# Altium PCB universky.PcbDoc
Units mil, origin at the board's own origin, x right, y up, seen from the top; angles counter-clockwise.
Board outline 2265.45 x 1390.45 mil, 4 copper layers (Top Layer, GND, 3.3V, Bottom Layer); 89 components, 109 nets, 441 pads, 43 vias.
Unrouted connection lines stored in the file: 22.
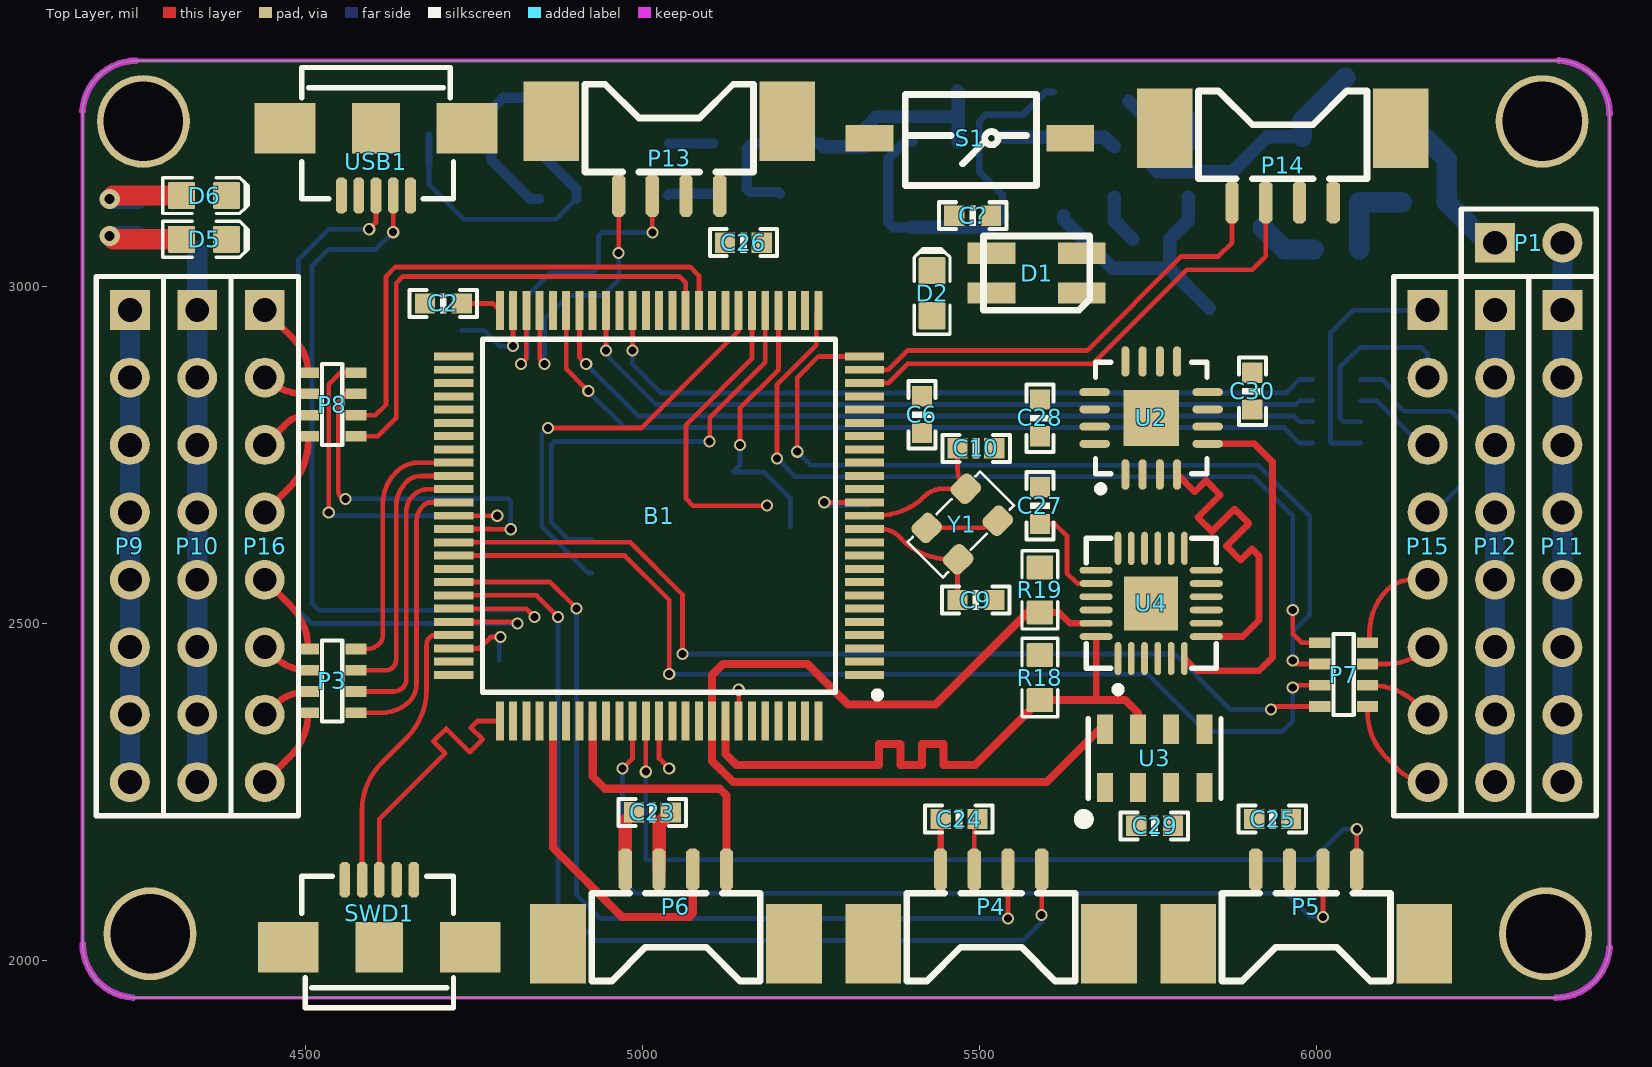
[diagram p0: Top Layer view]
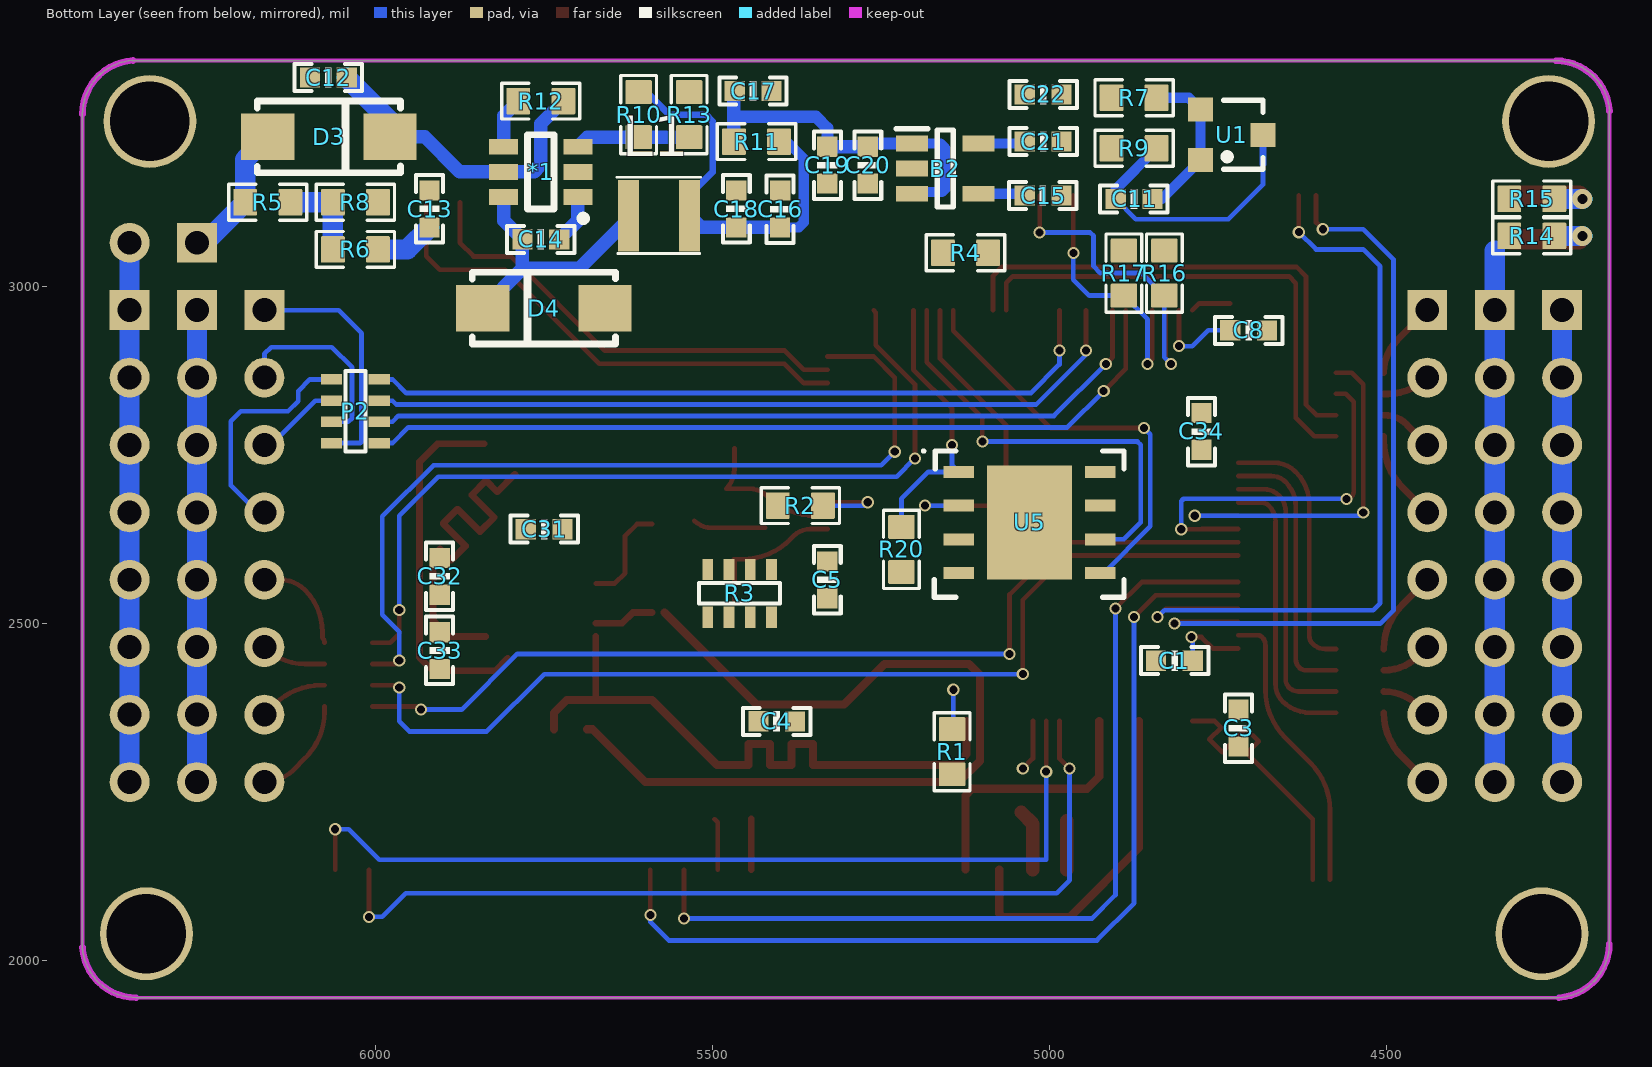
[diagram p1: Bottom Layer view, seen from below]
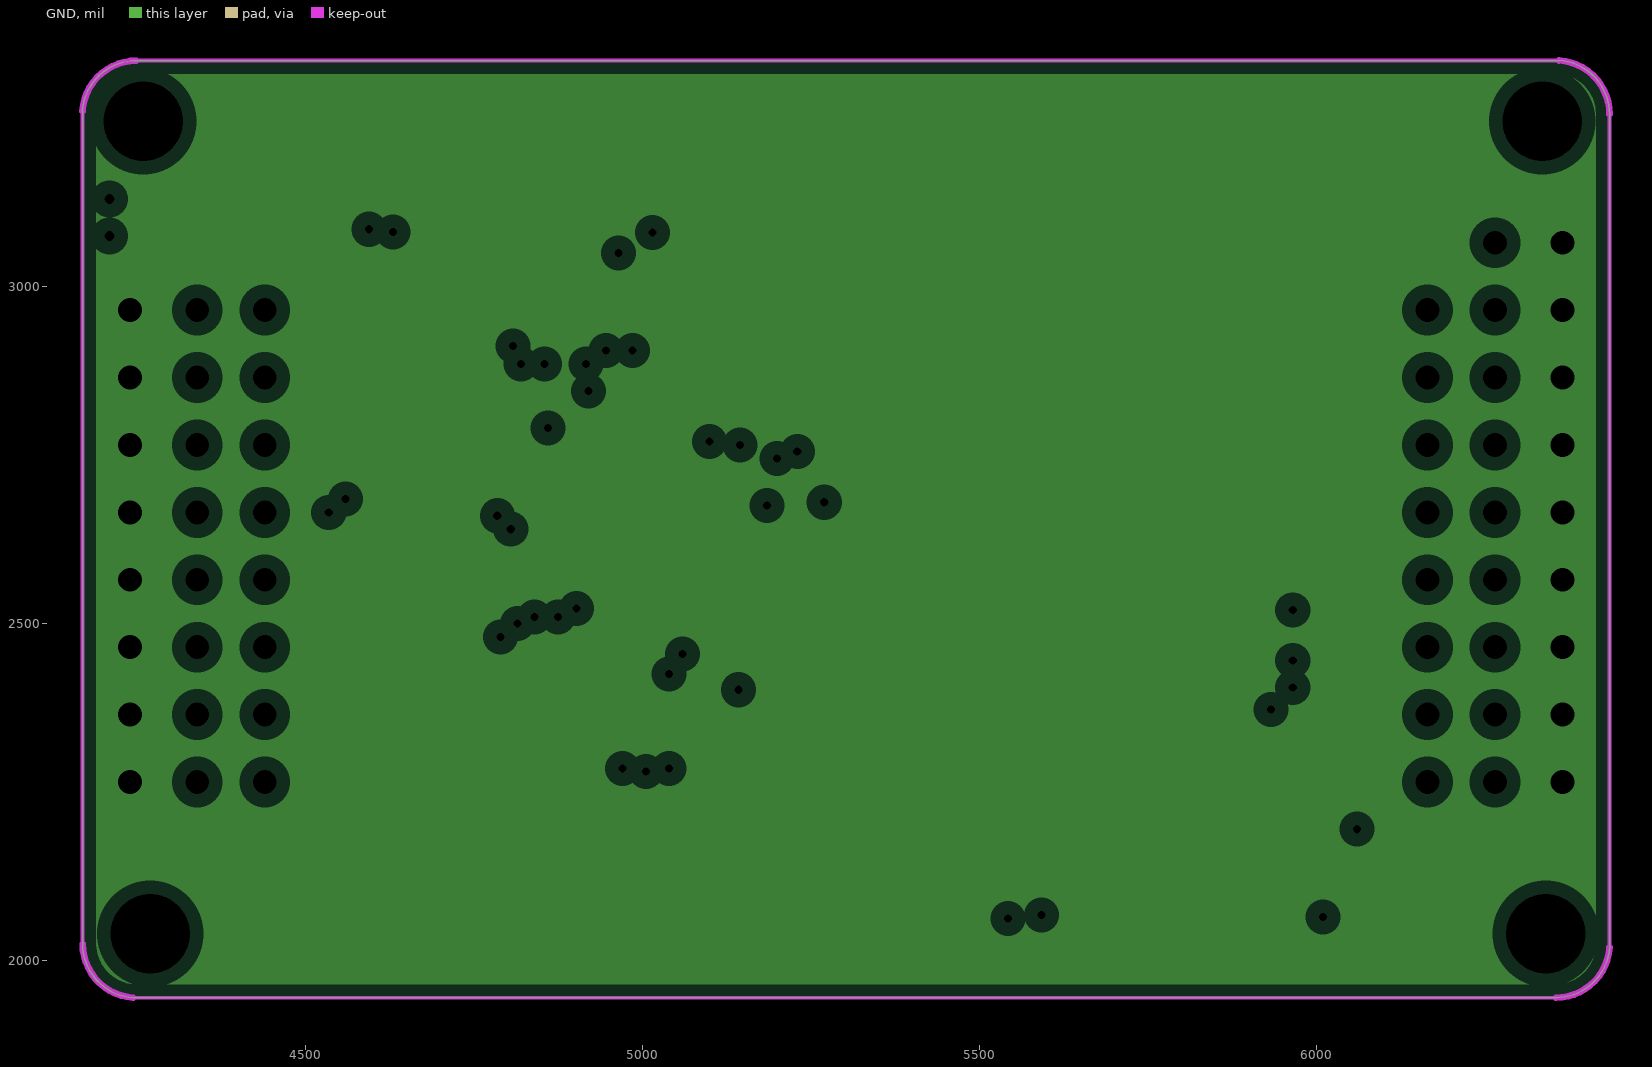
[diagram p2: GND, clearances drawn from the general rule]
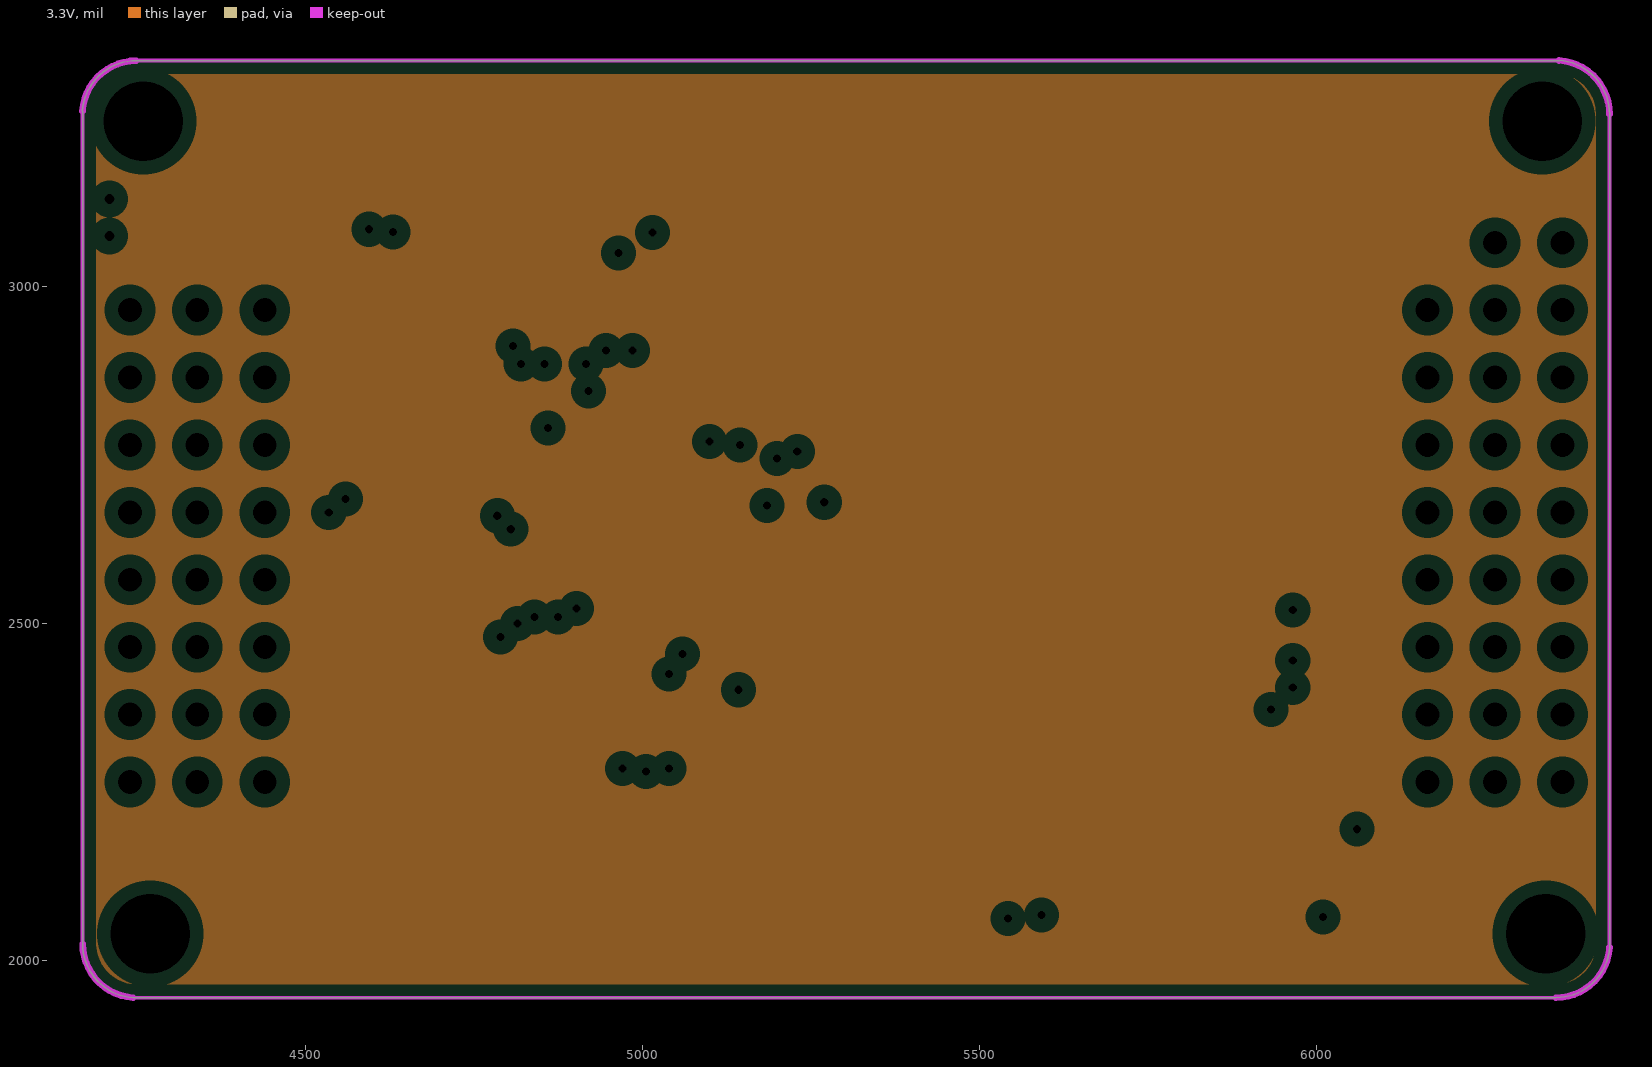
[diagram p3: 3.3V, clearances drawn from the general rule]
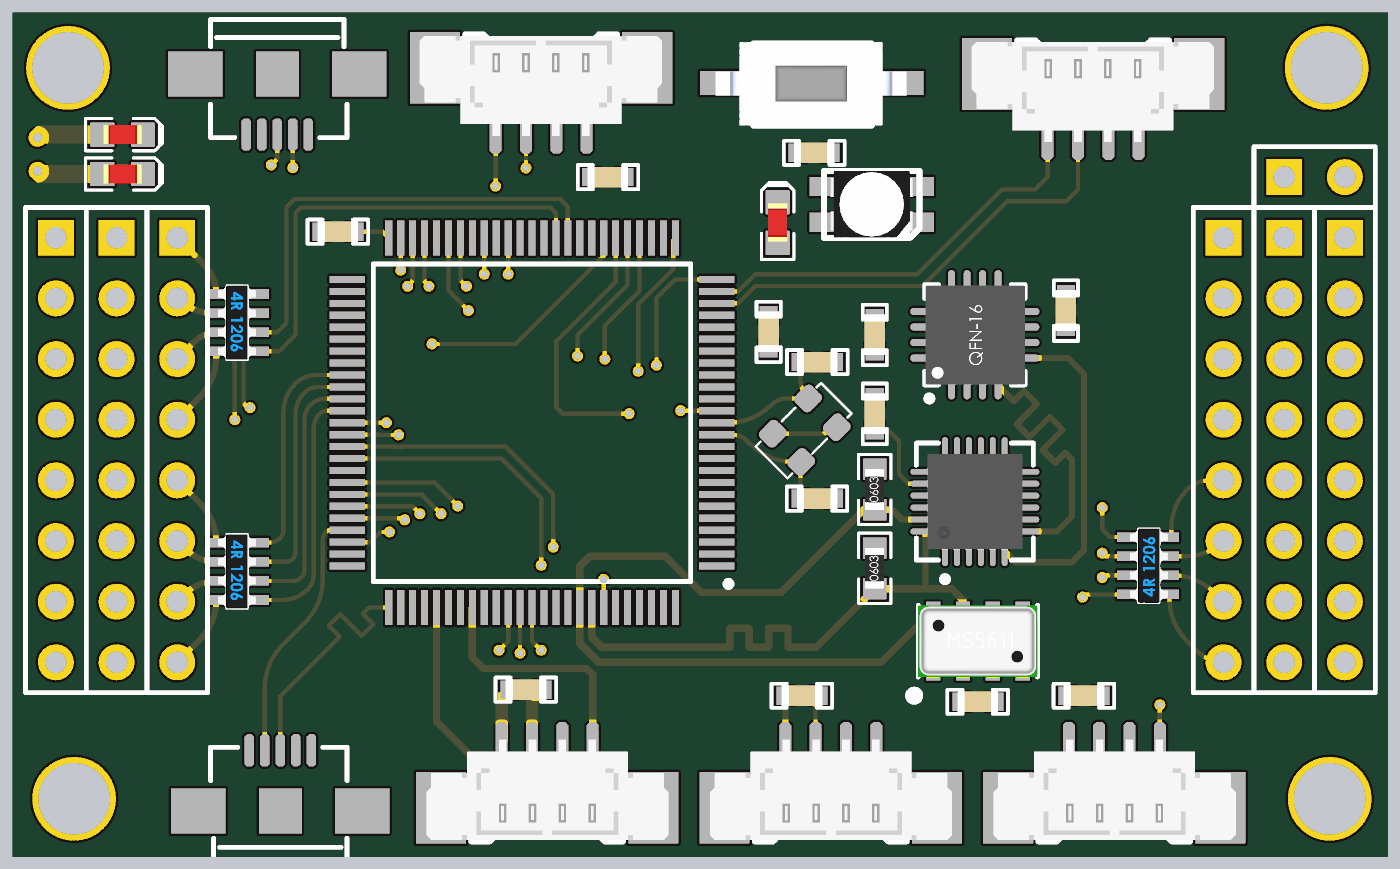
[diagram p4: 3D render of the assembled board from above, using the file's embedded part models]
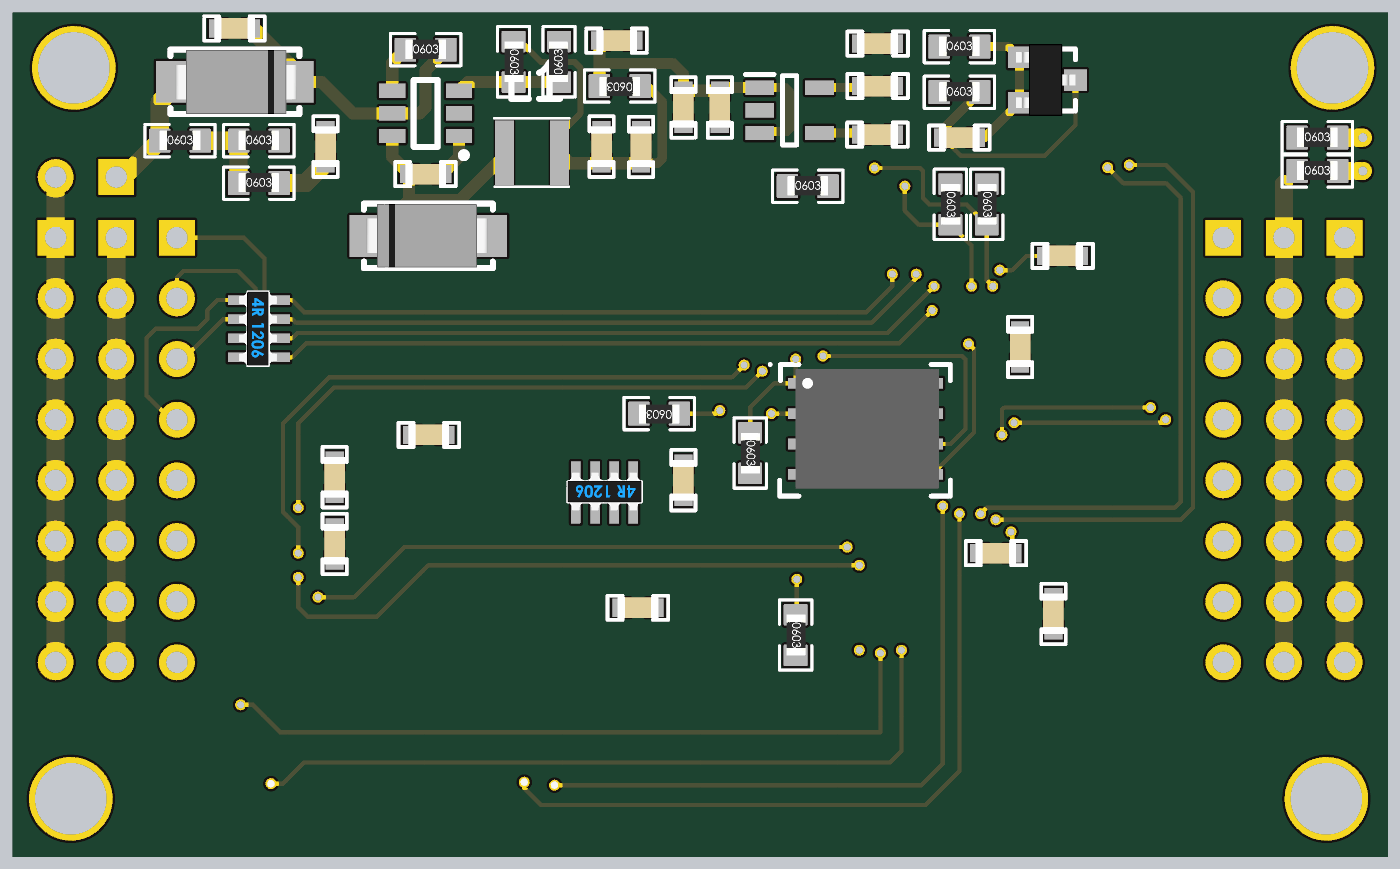
[diagram p5: 3D render of the assembled board from below, using the file's embedded part models]

## Layer stack, top to bottom
Top Layer: signal copper 1.4
Dielectric: core 12.6, FR-4, Dk 4.8
GND: plane copper 1.4, net GND
Dielectric: prepreg 12.6, FR-4, Dk 4.8
3.3V: plane copper 1.4, net 3.3V
Dielectric: core 12.6, FR-4, Dk 4.8
Bottom Layer: signal copper 1.4

## Board outline
4170,2025 ccw(c4250,2025) 4244.89,1945.16 4244.89,1945 6355.16,1945 6355.16,1945.11 ccw(c6355.16,2025.11) 6435,2020 6435,3255.62 6434.92,3255.62 ccw(c6354.92,3255.62) 6360.03,3335.45 6360.03,3335 4249.38,3335 4249.38,3334.92 ccw(c4249.38,3254.92) 4169.55,3260.03 4170,3260.03

## Design rules (kind name [scope] priority, off if disabled: settings)
Clearance [All] p1: gap=7
ComponentClearance [All] p1: gap=0 collisioncheckmode=3 verticalgap=0 showdistances=FALSE
Length "InNet('SWCLK') Or InNet('SWDIO')_1" [InNet('SWCLK') Or InNet('SWDIO')] p1: maxlimit=436 minlimit=420
Length "InNet('AUX_CL') Or InNet('AUX_DA')_1" [InNet('AUX_CL') Or InNet('AUX_DA')] p2: maxlimit=556 minlimit=520
Length "InNet('AUX_CL') Or InNet('AUX_DA')" [InNet('AUX_CL') Or InNet('AUX_DA')] p3: maxlimit=560 minlimit=520
Length "InNet('AUX_DA') Or InNet('AUX_CL')" [InNet('AUX_DA') Or InNet('AUX_CL')] p4: maxlimit=290 minlimit=360
Length "InNet('I2C1_SDA') Or InNet('I2C1_SCL')" [InNet('I2C1_SDA') Or InNet('I2C1_SCL')] p5: maxlimit=712 minlimit=650
Length "InNet('SWCLK') Or InNet('SWDIO')" [InNet('SWCLK') Or InNet('SWDIO')] p6: maxlimit=420 minlimit=380
PlaneClearance [All] p1: clearance=20
PlaneConnect [All] p1: planeconnectstyle=Relief reliefexpansion=20 reliefentries=4 reliefconductorwidth=10 reliefairgap=10
PolygonConnect [All] p1: connectstyle=Relief reliefconductorwidth=10 reliefentries=4 polygonreliefangle="90 Angle" airgapwidth=10
RoutingVias [All] p1: holewidth=28 width=50 viastyle="Through Hole" minholewidth=28 minwidth=50 maxholewidth=28 maxwidth=50
SilkToSilkClearance [All] p1: silktosilkclearance=0
SilkToSolderMaskClearance [IsPad] p1: minsilkscreentomaskgap=0 clearancetoexposedcopper=TRUE
SolderMaskExpansion [All] p1: expansion=4
Width [All] p1: maxlimit=100 minlimit=6 preferedwidth=10 minimp=50.000000 maximp=50.000000 favimp=50.000000
23 further rules are at their usual default settings.

## Classes and differential pairs
component class universky-CONNECTOR: C23 C24 C25 C26 P2 P4 P5 P6 P7 P8 P9 P10 P11 P12 P13 P14 P15 P16 R16 R17
component class universky-MCU: B1 C1 C2 C3 C4 C5 C6 C8 C9 C10 C? D1 D2 R1 R2 R3 R4 S1 SWD1 USB1 Y1
component class universky-POWER: *1 B2 C11 C12 C13 C14 C15 C16 C17 C18 C19 C20 C21 C22 D3 D4 D5 D6 L1 P1 R5 R6 R7 R8 R9 R10 R11 R12 R13 R14 R15 U1
component class universky-SENSOR: C27 C28 C29 C30 C31 C32 C33 C34 R18 R19 R20 U2 U3 U4 U5

## Components (designator, comment, footprint, x,y, rotation, side; value= is the part's Value field where it differs from the comment)
*1 "AOZ1282C" LMR14206 5755,3170 r180 bottom
B1 "STM32F407VGT6" QFP50P1600X1600X160-100N 5025,2660 r180 top
B2 "MIC5219-3.3YM5_TR" SOT95P280X145-5N 5155,3175 r180 bottom
C1 "Cap" 0603_C 4815,2445 r0 bottom
C2 "Cap" 0603_C 4705,2975 r0 top
C3 "Cap" 0603_C 4720,2345 r90 bottom
C4 "Cap" 0603_C 5405,2355 r180 bottom
C5 "Cap" 0603_C 5330,2565 r270 bottom
C6 "Cap" 0603_C 5415,2810 r90 top
C8 "Cap" 0603_C 4705,2935 r0 bottom
C9 "22pF" 0603_C 5495,2535 r0 top
C10 "22pF" 0603_C 5495,2760 r180 top
C11 "Cap" 0603_C 4875,3130 r180 bottom
C12 "47uf" 0603_C 6070,3310 r180 bottom
C13 "47uf" 0603_C 5920,3115 r270 bottom
C14 "Cap" 0603_C 5755,3070 r180 bottom
C15 "Cap" 0603_C 5010,3135 r180 bottom
C16 "104" 0603_C 5400,3115 r90 bottom
C17 "104" 0603_C 5440,3290 r180 bottom
C18 "47uf" 0603_C 5465,3115 r270 bottom
C19 "Cap" 0603_C 5330,3180 r90 bottom
C20 "Cap" 0603_C 5270,3180 r90 bottom
C21 "Cap" 0603_C 5010,3215 r0 bottom
C22 "Cap" 0603_C 5010,3285 r0 bottom
C23 "Cap" 0603_C 5015,2220 r0 top
C24 "Cap" 0603_C 5470,2210 r0 top
C25 "Cap" 0603_C 5935,2210 r0 top
C26 "Cap" 0603_C 5150,3065 r180 top
C27 "Cap" 0603_C 5590,2675 r90 top
C28 "Cap" 0603_C 5590,2805 r90 top
C29 "Cap" 0603_C 5760,2200 r0 top
C30 "Cap" 0603_C 5905,2845 r90 top
C31 "Cap" 0603_C 5750,2640 r0 bottom
C32 "Cap" 0603_C 5905,2570 r270 bottom
C33 "Cap" 0603_C 5905,2460 r270 bottom
C34 "Cap" 0603_C 4775,2785 r90 bottom
C? "Cap" 0603_C 5490,3105 r180 top
D1 "RGB-2" RGB-2 5585,3010 r0 top
D2 "LED0" 0603_LED 5430,2990 r90 top
D3 "1N5819" DO_214 6080,3220 r180 bottom
D4 "1N5819" DO_214 5740,2970 r0 bottom
D5 "LED0" 0603_LED 4350,3070 r0 top
D6 "LED0" 0603_LED 4350,3135 r0 top
L1 "15uh" L3*3 5625,3105 r180 bottom
P1 "Header 2" HDR1X2 6265,3065 r0 top
P2 "1K排阻" HDR_R_4 6155,2825 r0 bottom
P3 "10K排阻" HDR_R_4 4415,2425 r180 top
P4 "USART1" SMD-1.25 5522.5,2075 r180 top
P5 "USART2" SMD-1.25 5990,2075 r180 top
P6 "USART5" SMD-1.25 5055,2075 r180 top
P7 "1K排阻" HDR_R_4 6165.43,2414.25 r0 top
P8 "10K排阻" HDR_R_4 4415,2835 r180 top
P9 "Header 8" HDR1X8 4240,2965 r270 top
P10 "Header 8" HDR1X8 4340,2965 r270 top
P11 "Header 8" HDR1X8 6365,2965 r270 top
P12 "Header 8" HDR1X8 6265,2965 r270 top
P13 "I2C" SMD-1.25 5035,3195 r0 top
P14 "I2C" SMD-1.25 5945,3185 r0 top
P15 "Header 8" HDR1X8 6165,2965 r270 top
P16 "Header 8" HDR1X8 4440,2965 r270 top
R1 "Res2" 0603_R 5145,2310 r270 bottom
R2 "RES_10K" 0603_R 5370,2675 r0 bottom
R3 "100排阻" HDR_R_4 5450,2670 r90 bottom
R4 "Res2" 0603_R 5125,3050 r180 bottom
R5 "Res2" 0603_R 6160,3125 r180 bottom
R6 "Res2" 0603_R 6030,3055 r180 bottom
R7 "Res2" 0603_R 4875,3280 r180 bottom
R8 "Res2" 0603_R 6030,3125 r180 bottom
R9 "Res2" 0603_R 4875,3205 r180 bottom
R10 "Res2" 0603_R 5610,3255 r270 bottom
R11 "Res2" 0603_R 5435,3215 r0 bottom
R12 "Res2" 0603_R 5755,3275 r180 bottom
R13 "Res2" 0603_R 5535,3255 r90 bottom
R14 "Res2" 0603_R 4285,3075 r180 bottom
R15 "Res2" 0603_R 4285,3130 r180 bottom
R16 "Res2" 0603_R 4830,3020 r270 bottom
R17 "Res2" 0603_R 4890,3020 r270 bottom
R18 "Res2" 0603_R 5590,2420 r90 top
R19 "Res2" 0603_R 5590,2550 r90 top
R20 "Res2" 0603_R 5220,2610 r270 bottom
S1 "SW-PB" KEY_SMD 5483.3,3217.8 r180 top
SWD1 "Header 5" USB_Micro 4610,2020 r0 top
U1 "TL431A" SOT_23 4730,3225 r270 bottom
U2 "AK8975" QFN_16 5770,2800 r90 top
U3 "MS5611" QFN_8 5740,2300 r90 top
U4 "MPU6050" QFN_24 5764.69,2535 r0 top
U5 "W25Q32FVZPIG" WDFN_8 5030,2660 r180 bottom
USB1 "Header 5" USB_Micro 4605,3235 r180 top
Y1 "XATLS" XTAL_3225 5528.08,2651.92 r225 top

## Footprints (in the part's own frame and the unit in brackets; to place one, negate y for a bottom-side part, rotate by r counter-clockwise, add the part's x,y. Pads: shape width x height; smd on the part's side, far side on the other; paste and mask are expansions set on the pad)
0603_C [mil]
  rect 30x30 smd: 1(-27.25,0.03) 2(27.25,-0.03)
  silkscreen extent -50,-20 50,20, body extent -33,-18 33,18, height 35
0603_LED [mil]
  rrect10% 40.5x40 smd: 1(-33.46,0)
  rrect10% 40x40 smd: 2(33.46,0)
  silkscreen extent -61,-27 66,27, body extent -31,-16 32,16, height 30
0603_R [mm]
  rrect10% 0.9x1 smd: 1(-0.85,0) 2(0.85,0)
  silkscreen extent -1.47,-0.67 1.47,0.67, body extent -0.85,-0.38 0.85,0.42, height 0.56
DO_214 [mm]
  rect 2x1.75 smd: 1(-2.032,0.051) 2(2.568,0.051)
  silkscreen extent -2.43,-1.3 2.97,1.4, body extent -2.23,-1.29 2.88,1.38, height 2.12
HDR1X2 [mm] "Connector; Header; 2 Position"
  rect 1.5x1.5 hole 0.9: 1(0,0)
  round 1.5 hole 0.9: 2(2.54,0)
  silkscreen extent -1.27,-1.27 3.81,1.27
HDR1X8 [mm] "Connector; Header; 8 Position"
  rect 1.5x1.5 hole 0.9: 1(0,0)
  round 1.5 hole 0.9: 2(2.54,0) 3(5.08,0) 4(7.62,0) 5(10.16,0) 6(12.7,0) 7(15.24,0) 8(17.78,0)
  silkscreen extent -1.27,-1.27 19.05,1.27
HDR_R_4 [mm]
  rect 0.8x0.4 smd: 1(-4.075,1.454) 2(-4.075,0.654) 3(-4.075,-0.146) 4(-4.075,-0.946) 5(-2.275,1.454) 6(-2.275,0.654) 7(-2.275,-0.146) 8(-2.275,-0.946)
  silkscreen extent -3.56,-1.27 -2.79,1.78, body extent -3.94,-1.35 -2.34,1.85, height 0.59
KEY_SMD [mm]
  rect 1.8x1 smd: 1(-3.853,-0.056) 2(3.716,-0.056)
  silkscreen extent -2.58,-1.71 2.37,1.72, body extent -4.04,-1.78 3.96,1.72, height 8.02
L3*3 [mm]
  rect 0.8x2.7 smd mask+0.051: 1(0,0) 2(2.3,0)
  silkscreen extent -0.43,-1.42 2.72,1.45
LMR14206 [mm]
  rect 1.1x0.6 smd: 1(1.4,-0.95) 2(1.4,0) 3(1.4,0.95) 4(-1.4,0.95) 5(-1.4,0) 6(-1.4,-0.95)
  silkscreen extent -0.5,-1.87 1.72,1.4
QFN_8 [mm]
  rect 1.1x0.6 smd: 1(-1.1,1.367) 2(-1.1,0.117) 3(-1.1,-1.133) 4(-1.1,-2.383) 5(1.1,-2.383) 6(1.1,-1.133) 7(1.1,0.117) 8(1.1,1.367)
  silkscreen extent -2.41,-3.01 1.5,2.29, body extent -1.55,-3.01 1.55,1.99, height 1.01
QFN_16 [mm]
  oval 1.15x0.3 smd: 1(-2.002,1.356) 2(-2.002,0.706) 3(-2.002,0.056) 4(-2.002,-0.594) 9(2.256,-0.594) 10(2.256,0.056) 11(2.256,0.706) 12(2.256,1.356)
  oval 0.3x1.15 smd: 5(-0.848,-1.748) 6(-0.198,-1.748) 7(0.452,-1.748) 8(1.102,-1.748) 13(1.102,2.51) 14(0.452,2.51) 15(-0.198,2.51) 16(-0.848,2.51)
  rect 2.1x2.1 smd: 17(0.127,0.381)
  silkscreen extent -2.66,-1.72 2.23,2.48, body extent -1.97,-1.72 2.2,2.45, height 0.85
QFN_24 [mm]
  oval 0.25x1.25 smd: 1(-1.496,-2.202) 2(-0.996,-2.202) 3(-0.496,-2.202) 4(0.004,-2.202) 5(0.504,-2.202) 6(1.004,-2.202) 13(1.004,1.948) 14(0.504,1.948) 15(0.004,1.948) 16(-0.496,1.948) 17(-0.996,1.948) 18(-1.496,1.948)
  oval 1.25x0.25 smd: 7(1.829,-1.377) 8(1.829,-0.877) 9(1.829,-0.377) 10(1.829,0.123) 11(1.829,0.623) 12(1.829,1.123) 19(-2.321,1.123) 20(-2.321,0.623) 21(-2.321,0.123) 22(-2.321,-0.377) 23(-2.321,-0.877) 24(-2.321,-1.377)
  rect 2.032x2.032 smd: 25(-0.246,-0.127)
  silkscreen extent -2.7,-3.5 2.2,2.32, body extent -2.25,-2.13 1.75,1.87, height 1
QFP50P1600X1600X160-100N [mm]
  rect 1.475x0.3 smd: 1(-7.738,6) 2(-7.738,5.5) 3(-7.738,5) 4(-7.738,4.5) 5(-7.738,4) 6(-7.738,3.5) 7(-7.738,3) 8(-7.738,2.5) 9(-7.738,2) 10(-7.738,1.5) 11(-7.738,1) 12(-7.738,0.5) 13(-7.738,0) 14(-7.738,-0.5) 15(-7.738,-1) 16(-7.738,-1.5) 17(-7.738,-2) 18(-7.738,-2.5) 19(-7.738,-3) 20(-7.738,-3.5) 21(-7.738,-4) 22(-7.738,-4.5) 23(-7.738,-5) 24(-7.738,-5.5) 25(-7.738,-6) 51(7.738,-6) 52(7.738,-5.5) 53(7.738,-5) 54(7.738,-4.5) 55(7.738,-4) 56(7.738,-3.5) 57(7.738,-3) 58(7.738,-2.5) 59(7.738,-2) 60(7.738,-1.5) 61(7.738,-1) 62(7.738,-0.5) 63(7.738,0) 64(7.738,0.5) 65(7.738,1) 66(7.738,1.5) 67(7.738,2) 68(7.738,2.5) 69(7.738,3) 70(7.738,3.5) 71(7.738,4) 72(7.738,4.5) 73(7.738,5) 74(7.738,5.5) 75(7.738,6)
  rect 0.3x1.475 smd: 26(-6,-7.738) 27(-5.5,-7.738) 28(-5,-7.738) 29(-4.5,-7.738) 30(-4,-7.738) 31(-3.5,-7.738) 32(-3,-7.738) 33(-2.5,-7.738) 34(-2,-7.738) 35(-1.5,-7.738) 36(-1,-7.738) 37(-0.5,-7.738) 38(0,-7.738) 39(0.5,-7.738) 40(1,-7.738) 41(1.5,-7.738) 42(2,-7.738) 43(2.5,-7.738) 44(3,-7.738) 45(3.5,-7.738) 46(4,-7.738) 47(4.5,-7.738) 48(5,-7.738) 49(5.5,-7.738) 50(6,-7.738) 76(6,7.738) 77(5.5,7.738) 78(5,7.738) 79(4.5,7.738) 80(4,7.738) 81(3.5,7.738) 82(3,7.738) 83(2.5,7.738) 84(2,7.738) 85(1.5,7.738) 86(1,7.738) 87(0.5,7.738) 88(0,7.738) 89(-0.5,7.738) 90(-1,7.738) 91(-1.5,7.738) 92(-2,7.738) 93(-2.5,7.738) 94(-3,7.738) 95(-3.5,7.738) 96(-4,7.738) 97(-4.5,7.738) 98(-5,7.738) 99(-5.5,7.738) 100(-6,7.738)
  silkscreen extent -8.35,-6.65 6.65,6.87
RGB-2 [mm]
  rect 1.8x0.8 smd: 1(1.7,-0.496) 2(-1.7,-0.496) 3(1.7,1.004) 4(-1.7,1.004)
  silkscreen extent -2,-1.15 2,1.65, body extent -1.75,-1.14 1.75,1.66, height 1.93
SMD-1.25 [mm]
  oct 0.5x1.6 smd: 1(2.032,-1.524) 2(0.762,-1.524) 3(-0.508,-1.524) 4(-1.778,-1.524)
  rect 2.1x3 smd: 5(4.572,1.27) 6(-4.318,1.27)
  silkscreen extent -3.05,-0.64 3.3,2.67, body extent -4.96,-1.59 5.19,2.61, height 4.76
SOT95P280X145-5N [mm]
  rect 1.2x0.6 smd: 1(-1.25,0.95) 2(-1.25,0) 3(-1.25,-0.95) 4(1.25,-0.95) 5(1.25,0.95)
  silkscreen extent -1.85,-1.45 0.3,1.5
SOT_23 [mm]
  rect 0.9x0.95 smd: 1(0.95,-1.175) 2(-0.95,-1.175) 3(0,1.175)
  silkscreen extent -1.3,-0.3 1.3,1.18, body extent -1.5,-1.32 1.5,1.18, height 1.12
USB_Micro [mm] "USB方孔"
  oct 0.4x1.35 smd: 1(-1.3,2.54) 2(-0.65,2.54) 3(0,2.54) 4(0.65,2.54) 5(1.3,2.54)
  rect 2.286x1.9 smd: 6(3.429,0) 7(-3.429,0)
  rect 1.8x1.9 smd: 8(0,0)
  silkscreen extent -2.92,-2.29 2.79,2.67
WDFN_8 [mm]
  rect 1.15x0.45 smd: 1(-2.667,1.651) 2(-2.667,0.381) 3(-2.667,-0.889) 4(-2.667,-2.159) 5(2.667,-2.159) 6(2.667,-0.889) 7(2.667,0.381) 8(2.667,1.651)
  rect 3.19x4.3 smd paste-1.595 mask+0: 9(0,-0.254)
  silkscreen extent -4.04,-3.07 3.56,2.49, body extent -2.92,-2.75 3.08,2.25, height 0.81
XTAL_3225 [mm]
  rrect50% 1x0.9 smd: 1(2.083,-0.051) 2(0,-0.025) 3(0,-1.727) 4(2.083,-1.727)
  silkscreen extent -0.84,-1.85 2.97,0.03

## Part data
B1: "MCU 32-Bit, ARM Cortex M4, 1MB Flash STMicroelectronics STM32F407VGT6, 32bit ARM Cortex M4F Microcontroller, 168MHz, 1024 kB Flash, 100-Pin LQFP"
B2: "LDO Regulator Pos 3.3V 0.5A MIC5219-3.3YM5 TR, Low Dropout Voltage Regulator, 0.5A, 3.3 V ??1%, 2.5 ??? 12 Vin, 5-Pin SOT-23"
C1 C2 C3 C4 C5 C6 C8 C11 C14 C15 C19 C20 C21 C22 C23 C24 C25 C26 C27 C28 C29 C30 C31 C32 C33 C34 C?: "Capacitor"
C9 C10: library part CAP
C12 C13 C16 C17 C18: library part Cap
D2 D5 D6: "Typical INFRARED GaAs LED"
D3 D4: library part "Diode 1N4001", "1 Amp General Purpose Rectifier"
L1: library part Inductor
P1: "Header, 2-Pin"
P2 P3 P7 P8 R3: library part "Header 4X2A", "Header, 4-Pin, Dual row"
P4 P5 P6 P13 P14: library part "Header 4", "Header, 4-Pin"
P9 P10 P11 P12 P15 P16: "Header, 8-Pin"
R1 R4 R5 R6 R7 R8 R9 R10 R11 R12 R13 R14 R15 R16 R17 R18 R19 R20: "Resistor"
SWD1 USB1: "Header, 5-Pin"
Y1: "贴片有源晶振"

## Free pads (board coordinates)
  round 137.8 hole 118.11: 33(4260,3245) 33(4270,2040) 33(6335,3245) 33(6340,2040)

## Via types
v1: diameter 18, hole 12, Top Layer to Bottom Layer, 41 vias
v2: diameter 30, hole 15, Top Layer to Bottom Layer, 2 vias

## Nets (pads, with @x,y where several pads share a name; then routed paths per layer and width w, separated by ;. In a path a pad name is that pad's centre, name@x,y a point inside that pad or via, vN(x,y) a via of type N, cw(c..) or ccw(c..) an arc to the next point about the centre after c; other vN are vias at no path point)
3.3V: B1.6 B1.11 B1.19 B1.22 B1.28 B1.50 B1.75 B1.100 B2.5 C2.2 C3.2 C4.2 C5.2 C6.2 C21.2 C22.2 C26.1 C28.1 C29.1 C30.1 C31.2 C33.1 C34.1 D1.2 D2.1 P13.1 P14.1 R2.2 R7.1 R15.1 R16.1 R17.1 R18.2 R19.2 R20.2 SWD1.1 U2.2 U2.7 U2.16 U3.1 U3.2 U4.8 U4.13 U5.3 U5.7 U5.8 | length 126.7
  Top Layer w7: C2.2 4778.46,2974.97 B1.50
  Bottom Layer w15: C21.2@5039.88,3212.4 B2.5
5V: B2.1 B2.3 C17.1 C19.2 C20.2 C23.1 C24.1 C25.1 P4.1 P5.1 P6.1 P10.1 P10.2 P10.3 P10.4 P10.5 P10.6 P10.7 P10.8 P12.1 P12.2 P12.3 P12.4 P12.5 P12.6 P12.7 P12.8 R11.2 R14.1 USB1.1 | length 2169.5
  Top Layer w10: P4.1@5442.75,2135.25 C24.1
  Top Layer w20: P6.1 C23.1@4975,2207.28
  Bottom Layer w15: B2.3 5201.81,3140 5160,3140 5155,3145 5155,3205 5162.4,3212.4 B2.1
  Bottom Layer w18: B2.1 C20.2@5264.82,3212.4 ; C19.2 5329.97,3234.97 5346.91,3251.91 5468.46,3251.91
  Bottom Layer w20: C20.2 C19.2 ; C17.1 5468.46,3288.82 5468.46,3251.91 R11.2
  Bottom Layer w30: P10.8 P10.7 P10.6 P10.5 P10.4 P10.3 P10.2 P10.1 4340,3053.46 ; P12.8 P12.7 P12.6 P12.5 P12.4 P12.3 P12.2 P12.1
9150_INT: B1.88 | length 76.6
  Top Layer w7: B1.88 5025,2300 v1(5040,2285)
ADC_IN0/TIM5_CH1/USART4_TX: B1.23 P14.3 | length 753.3
  Top Layer w7: B1.23 5365.11,2856.85 5393.58,2885.32 5668.15,2885.32 5807.84,3025 5905,3025 5925,3045 P14.3
ADC_IN1/TIM5_CH2/USART4_RX: B1.24 P14.4 | length 683.4
  Top Layer w7: B1.24 5365,2876.54 5393.46,2905 5660,2905 5799.69,3044.68 5854.69,3044.68 5875,3065 P14.4
AGND: B1.20 C11.1 R9.2 U1.3 | length 426
  Bottom Layer w7: 4683.74,3181.26 4683.74,3151.26 4735,3100 4872.22,3100 C11.1
  Bottom Layer w10: 4683.74,3181.26 U1.3
  Bottom Layer w15: R9.2 4902.25,3144.29 C11.1
AUX_CL: U2.4 U4.7 | length 543.9
  Top Layer w10: U2.4 5793.82,2721.18 5819.54,2695.46 5836.22,2712.14 5857.43,2690.93 5824.07,2657.57 5845.29,2636.35 5878.65,2669.71 5899.86,2648.5 5866.5,2615.14 5887.71,2593.93 5904.39,2610.61 5915,2600 5915,2505 5890.79,2480.79 U4.7
AUX_DA: U2.5 U4.6 | length 543.9
  Top Layer w10: U4.6 5822.52,2430 5915,2430 5935,2450 5935,2740 5908.39,2766.61 U2.5
BOOT0: B1.94 R1.1 | length 105.7
  Top Layer w7: B1.94 v1(5143.11,2401.89)
  Bottom Layer w7: v1(5143.11,2401.89) 5143.11,2345.35 R1.1
BOOT1: B1.37 R4.2
DCDC-5V: C16.1 C18.2 L1.2 R10.1 R11.1 | length 603.8
  Bottom Layer w10: L1.2 5534.45,3135.55 5500,3170 5500,3245 5510,3255 5565,3255 5598.46,3288.46 R10.1
  Bottom Layer w15: C16.1 5372.25,3087.75 5365,3095 5365,3190 5390,3215 R11.1
  Bottom Layer w20: C16.1 C18.2 5517.2,3087.75 L1.2
DRDY: U2.10
GND: *1.2 B1.10 B1.27 B1.74 B1.99 B2.2 C1.2 C2.1 C3.1 C4.1 C5.1 C6.1 C8.1 C9.2 C10.1 C12.1 C13.1 C15.2 C16.2 C17.2 C18.1 C19.1 C20.1 C21.1 C22.1 C23.2 C24.2 C25.2 C26.2 C27.2 C28.2 C29.2 C30.2 C31.1 C32.1 C33.2 C34.2 C?.2 D4.1 D5.2 D6.2 P1.2 P4.2 P5.2 P6.2 P9.1 P9.2 P9.3 P9.4 P9.5 P9.6 P9.7 P9.8 P11.1 P11.2 P11.3 P11.4 P11.5 P11.6 P11.7 P11.8 P13.2 P14.2 R1.2 R4.1 R8.2 R9.1 R13.2 S1.1 SWD1.4 SWD1.5 U2.11 U2.13 U2.15 U3.3 U3.4 U3.5 U4.9 U4.11 U4.18 U5.4 USB1.5 Y1.2 Y1.4 | length 1777.2
  Top Layer w7: Y1.4 5501.77,2642.02 ccw(c5501.77,2678.23) Y1.2 ; P4.2 5492.5,2205.22 C24.2
  Top Layer w20: P6.2 5025,2202.72 C23.2
  Bottom Layer w30: P9.8 P9.7 P9.6 P9.5 P9.4 P9.3 P9.2 P9.1 ; P11.8 P11.7 P11.6 P11.5 P11.4 P11.3 P11.2 P11.1 P1.2
I2C1_SCL: B1.92 R19.1 U3.8 U4.23 | length 1401.2
  Top Layer w10: R19.1 5618.46,2516.54 5634.53,2500.47 U4.23
  Top Layer w12: R19.1@5571.54,2516.54 5435,2380 5305,2380 5245,2440 5120,2440 5103.74,2423.74 B1.92 5103.74,2296.26 5135,2265 5600,2265 5678.31,2343.31 U3.8
I2C1_SDA: B1.93 R18.1 U3.7 U4.24 | length 955.4
  Top Layer w10: 5673.31,2388.23 U4.24
  Top Layer w12: B1.93 5123.43,2306.57 5140,2290 5351,2290 5351,2321.18 5383,2321.18 5383,2290 5415,2290 5415,2321.18 5447,2321.18 5447,2290 5493.46,2290 R18.1 5671.61,2386.54 ; 5673.31,2386.54 5716.54,2386.54 5735.39,2367.68 U3.7
INT_MPU: U4.12
Net*1_1: *1.1 C14.2 | length 74.2
  Bottom Layer w20: *1.1 5699.88,3097.84 C14.2
Net*1_3: *1.3 R10.2 R13.1 | length 170.7
  Bottom Layer w20: R13.1 R10.2 5685.75,3221.54 *1.3
Net*1_4: *1.4 R12.1 | length 76.6
  Bottom Layer w20: R12.1 5810.12,3253.35 *1.4
Net*1_6: *1.6 C14.1 D4.2 L1.1 | length 393.1
  Bottom Layer w20: L1.1 5625,3100 5698.15,3026.85 5782.25,3026.85 ; *1.6 5810.12,3097.9 C14.1 5782.25,3026.85 ; D4.2 5782.25,3026.85
NetB1_14: B1.14 C?.1 R2.1 S1.2 | length 128.4
  Top Layer w7: v1(5270,2680) 5270.31,2679.68 B1.14
  Bottom Layer w7: v1(5270,2680) 5275,2675 R2.1
NetB1_49: B1.49 C8.2 | length 139.1
  Top Layer w7: v1(4808.46,2911.54) B1.49
  Bottom Layer w7: C8.2 4764.97,2935.03 4788.46,2911.54 v1(4808.46,2911.54)
NetB1_73: B1.73 C1.1 | length 109.4
  Top Layer w7: B1.73 4758.15,2463.15 4775,2480 v1(4790,2480)
  Bottom Layer w7: C1.1 v1@4787.75,2477.75
NetB2_4: B2.4 C15.1 | length 69.6
  Bottom Layer w15: C15.1 5039.82,3137.6 B2.4
NetC27_1: C27.1 U4.20 | length 152.1
  Top Layer w7: C27.1 5612.25,2647.75 5630,2630 5630,2575 5645.47,2559.53 U4.20
NetC32_2: C32.2 U4.10
NetD1_1: D1.1 R3.7
NetD1_3: D1.3 R3.6
NetD1_4: D1.4 R3.5
NetD2_2: D2.2 R3.8
NetD5_1: D5.1 R14.2 | length 143.1
  Top Layer w30: v2@4215,3070 D5.1
  Bottom Layer w30: v2(4210,3075) R14.2
NetD6_1: D6.1 R15.2 | length 143.1
  Top Layer w30: v2@4215,3135 D6.1
  Bottom Layer w30: v2(4210,3130) R15.2
NetR5_2: R5.2 R6.1 R8.1 | length 133.1
  Bottom Layer w30: R6.1 R8.1 R5.2
OTG_FS_DM: B1.70 USB1.2 | length 1159.8
  Top Layer w7: v1@4630,3080 v1(4630.59,3080.59) USB1.2 ; B1.70 4827.8,2522.2 v1(4840,2510)
  Bottom Layer w7: v1(4630.59,3080.59) 4605,3055 4535,3055 4510,3030 4510,2530 4520,2520 4830,2520 v1(4840,2510)
OTG_FS_DP: B1.71 USB1.3 | length 1126.8
  Top Layer w7: v1(4595,3085) 4605,3095 USB1.3 ; B1.71 4812.48,2502.52 v1(4815,2500)
  Bottom Layer w7: v1(4595,3085) 4535,3085 4490,3040 4490,2520 4510,2500 v1(4815,2500)
PA8: B1.67
PC0: B1.15
PC1: B1.16
PC2: B1.17
PC3: B1.18
PC4: B1.33
PC5_POWER_INPUT: B1.34 C13.2 R6.2 | length 90.1
  Bottom Layer w30: C13.2 5952.78,3055 R6.2
PD8: B1.55
PD9: B1.56
PD10: B1.57
PD11: B1.58
PE0: B1.97 R3.4
PE1: B1.98 R3.3
PE2: B1.1 R3.2
PE3: B1.2 R3.1
PE7: B1.38
PE8: B1.39
PE9: B1.41
PE12: B1.43
PH0_OSC_IN: B1.12 C9.1 Y1.1 | length 212.4
  Top Layer w7: B1.12 5355.1,2640.32 cw(c5355.1,2605.1) 5380,2630 5385.36,2624.64 ccw(c5456.07,2695.35) 5456.07,2595.35 Y1.1 ccw(c5470.95,2593.09) 5467.75,2593.09 C9.1
PH1_OSC_OUT: B1.13 C10.2 Y1.3 | length 224.4
  Top Layer w7: B1.13 5348.58,2660 ccw(c5348.58,2760) 5419.29,2689.29 cw(c5445.15,2663.43) 5445.15,2700 Y1.3 cw(c5509.57,2729.57) 5467.75,2729.57 C10.2
PWMIN_1: P8.8 P16.1 | length 116.6
  Top Layer w10: P16.1 4484.63,2920.37 cw(c4436.51,2872.24) P8.8
PWMIN_2: P8.7 P16.2 | length 71
  Top Layer w10: P16.2 ccw(c4498.55,2923.55) 4498.55,2840.75 P8.7
PWMIN_3: P8.6 P16.3 | length 80.8
  Top Layer w10: P16.3 4469.89,2794.89 cw(c4504.57,2760.21) P8.6
PWMIN_4: P8.5 P16.4 | length 135.2
  Top Layer w10: P16.4 4475.28,2700.28 ccw(c4404.57,2770.99) 4504.57,2770.99 P8.5
PWMIN_5: P3.8 P16.5 | length 125.5
  Top Layer w10: P16.5 4477.56,2527.44 cw(c4412.37,2462.24) P3.8
PWMIN_6: P3.7 P16.6 | length 75.6
  Top Layer w10: P16.6 4452.82,2452.18 ccw(c4504.57,2503.93) P3.7
PWMIN_7: P3.6 P16.7 | length 75.6
  Top Layer w10: P16.7 4452.82,2377.82 cw(c4504.57,2326.07) P3.6
PWMIN_8: P3.5 P16.8 | length 125.5
  Top Layer w10: P16.8 4477.56,2302.56 ccw(c4412.37,2367.76) P3.5
PWMOUT_1: P2.5 P15.1 | length 364.7
  Bottom Layer w7: P2.5 6023.06,2767.76 6020.81,2770 6020.81,2930.82 6055,2965 P15.1
PWMOUT_2: P2.6 P15.2 | length 289.5
  Bottom Layer w7: P2.6 6040.56,2799.25 6035,2804.82 6035,2880 6065,2910 6155,2910 6165,2900 P15.2
PWMOUT_3: P2.7 P15.3 | length 126.8
  Bottom Layer w7: P2.7 6089.25,2830.75 6155,2765 P15.3
PWMOUT_4: P2.8 P15.4 | length 345.7
  Bottom Layer w7: P2.8 6097.76,2862.24 6115,2845 6115,2830 6130,2815 6200,2815 6215,2800 6215,2705 6175,2665 P15.4
PWMOUT_5: P7.5 P15.5 | length 126.5
  Top Layer w7: P7.5 cw(c6086.42,2471.5) 6078.96,2478.96 6078.96,2487.12 cw(c6167.88,2487.12) 6105,2550 cw(c6141.21,2513.79) P15.5@6141.21,2565
PWMOUT_6: P7.6 P15.6 | length 95.8
  Top Layer w7: P7.6 6104.64,2440 ccw(c6104.64,2525.36) P15.6
PWMOUT_7: P7.7 P15.7 | length 103
  Top Layer w7: P7.7 6081.32,2408.5 cw(c6081.32,2311.5) 6149.91,2380.09 P15.7
PWMOUT_8: P7.8 P15.8 | length 156.8
  Top Layer w7: P7.8 6075.87,2369.31 ccw(c6172.87,2369.31) 6104.28,2300.72 6122.32,2282.68 ccw(c6165,2325.36) P15.8
SPI1_MISO: B1.31 U5.2 | length 494.3
  Top Layer w7: B1.31 5162.8,2892.8 5065,2795 5065,2685 5075,2675 v1(5185,2675)
  Bottom Layer w7: U5.2 v1(5185,2675)
SPI1_MOSI: B1.32 U5.5 | length 625.3
  Top Layer w7: v1(4860,2790) 4998.57,2790 5143.11,2934.54 B1.32
  Bottom Layer w7: v1(4860,2790) 4851,2781 4851,2644.2 4920.2,2575 U5.5
SPI1_NSS: B1.29 R20.1 U5.1 | length 410.6
  Top Layer w7: v1(5145,2765) 5145,2819.6 5202.17,2876.76 B1.29
  Bottom Layer w7: v1(5145,2765) 5145,2735 U5.1 5180,2725 5220,2685 R20.1
SPI1_SCK: B1.30 U5.6 | length 651.2
  Top Layer w7: v1(5100,2770) 5100,2805 5182.48,2887.48 B1.30
  Bottom Layer w7: U5.6 4890,2625 4865,2650 4865,2765 4870,2770 v1(5100,2770)
SPI2_MISO: B1.53
SPI2_MOSI: B1.54
SPI2_NSS: B1.51
SPI2_SCK: B1.52
SWCLK: B1.76 SWD1.3 | length 428.4
  Top Layer w7: SWD1.3 4610,2210 4707.62,2307.62 4690.04,2325.21 4709.14,2344.3 4744.3,2309.14 4763.39,2328.23 4745.81,2345.81 4755.35,2355.35 B1.76
SWDIO: B1.72 SWD1.2 | length 428.4
  Top Layer w7: SWD1.2 4584.41,2222.99 cw(c4684.41,2222.99) 4613.7,2293.7 4650.71,2330.71 ccw(c4580,2401.42) 4680,2401.42 4680,2467.93 cw(c4697.07,2467.93) 4685,2480 cw(c4691.84,2473.16) 4691.84,2482.83 B1.72
TIM1_CH1: B1.40 P2.4 | length 1115.1
  Top Layer w7: v1(4985.63,2905) B1.40
  Bottom Layer w7: v1(4985.63,2905) 4985.63,2884.37 5028,2842 5954.76,2842 5975,2862.24 P2.4
TIM1_CH2: B1.42 P2.3 | length 1147.1
  Top Layer w7: v1(4946.26,2905) B1.42
  Bottom Layer w7: v1(4946.26,2905) 4946.26,2898.74 5020,2825 5969.25,2825 5975,2830.75 P2.3
TIM1_CH3: B1.44 P2.2 | length 1197
  Top Layer w7: B1.44 4906.89,2895 v1(4916.89,2885)
  Bottom Layer w7: v1(4916.89,2885) 4993.89,2808 5966.25,2808 5975,2799.25 P2.2
TIM1_CH4: B1.45 P2.1 | length 1232.7
  Top Layer w7: B1.45 4887.2,2877.8 v1@4915,2850
  Bottom Layer w7: v1(4920,2845) 4974,2791 5951.76,2791 5975,2767.76 P2.1
TIM3_CH1: B1.63 P8.4 | length 554.3
  Top Layer w7: v1(4535,2665) 4535,2855 4552.24,2872.24 P8.4 ; B1.63 v1(4785,2660)
  Bottom Layer w7: v1(4535,2665) 4540,2660 v1(4785,2660)
TIM3_CH2: B1.64 P8.3 | length 559
  Top Layer w7: v1(4560,2685) cw(c4560,2695.82) 4549.19,2695.82 4549.19,2829.18 4560.75,2840.75 P8.3 ; B1.64 4774.69,2640.32 4775,2640 v1(4805,2640)
  Bottom Layer w7: v1@4555,2685 v1(4560,2685) 4800,2685 cw(c4800,2680) 4805,2680 v1(4805,2640)
TIM3_CH3: B1.35 P8.2 | length 767.7
  Top Layer w7: P8.2 4604.25,2809.25 4620,2825 4620,3015 4634,3029 5071,3029 5084.06,3015.94 B1.35
TIM3_CH4: B1.36 P8.1 | length 749.2
  Top Layer w7: P8.1 4607.76,2777.76 4635,2805 4635,3005 4645,3015 5055,3015 5064.37,3005.63 B1.36
TIM4_CH1: B1.59 P3.4 | length 387.3
  Top Layer w7: P3.4 4591.28,2462.24 ccw(c4591.28,2488.72) 4610,2470 ccw(c4597.93,2482.07) 4615,2482.07 4615,2676.72 cw(c4683.28,2676.72) 4635,2725 cw(c4668.17,2691.83) 4668.17,2738.74 B1.59
TIM4_CH2: B1.60 P3.3 | length 408.8
  Top Layer w7: P3.3 4619.73,2430.75 ccw(c4619.73,2445.27) 4630,2435 ccw(c4617.93,2447.07) 4635,2447.07 4635,2673.79 cw(c4686.21,2673.79) 4650,2710 cw(c4671.86,2688.14) 4671.86,2719.06 B1.60
TIM4_CH3: B1.61 P3.2 | length 423
  Top Layer w7: P3.2 4631.12,2399.25 ccw(c4631.12,2418.88) 4645,2405 ccw(c4632.93,2417.07) 4650,2417.07 4650,2665.86 cw(c4684.14,2665.86) 4660,2690 cw(c4682.62,2667.38) 4682.62,2699.37 B1.61
TIM4_CH4: B1.62 P3.1 | length 426.1
  Top Layer w7: P3.1 4613.37,2367.76 ccw(c4613.37,2426.63) 4655,2385 ccw(c4630.86,2409.14) 4665,2409.14 4665,2650.86 cw(c4699.14,2650.86) 4675,2675 cw(c4686.31,2663.69) 4686.31,2679.69 B1.62
TIM5_CH3: B1.25 P7.2 | length 1288.8
  Top Layer w7: v1(5230,2755) 5230,2865 5261.22,2896.22 B1.25 ; v1(5965,2445) 5970,2440 P7.2
  Bottom Layer w7: v1(5230,2755) 5250,2735 5914.04,2735 5990,2659.04 5990,2513 5965,2488 v1(5965,2445)
TIM5_CH4: B1.26 P7.1 | length 1265.8
  Top Layer w7: v1(5200,2745) 5200,2854.8 5257.94,2912.74 5257.94,2961.37 B1.26 ; v1(5965,2520) 5965,2485 5978.5,2471.5 P7.1
  Bottom Layer w7: v1(5200,2745) 5227,2718 5907,2718 5965,2660 v1(5965,2520)
TIM8_CH3: B1.65 P7.4 | length 1449
  Top Layer w7: B1.65 4796.79,2620.63 4796.92,2620.5 4813.08,2620.5 4813.21,2620.63 4982.21,2620.63 5059.69,2543.15 5059.69,2465 ; v1(5060,2455) 5060,2479.68 ; v1@5937.01,2377.01 P7.4
  Bottom Layer w7: v1(5060,2455) 5790,2455 5872.5,2372.5 v1(5932.5,2372.5)
TIM8_CH4: B1.66 P7.3 | length 1514.8
  Top Layer w7: B1.66 4974.06,2600.94 5040,2535 v1(5040,2425) ; v1(5965,2405) 5968.5,2408.5 P7.3
  Bottom Layer w7: v1(5040,2425) 5750,2425 5835,2340 5950,2340 5965,2355 v1(5965,2405)
USART1_RX: B1.69 P4.4 | length 1422
  Top Layer w7: B1.69 4843.11,2541.89 v1(4875,2510) ; v1(5592.5,2067.5) P4.4
  Bottom Layer w7: v1(4875,2510) 4875,2085 4930,2030 5565,2030 5592.5,2057.5 v1(5592.5,2067.5)
USART1_TX: B1.68 P4.3 | length 1350.3
  Top Layer w7: B1.68 4863.43,2561.57 v1(4902.5,2522.5) ; v1(5542.5,2062.5) P4.3
  Bottom Layer w7: v1(4902.5,2522.5) 4902.5,2097.5 4937.5,2062.5 v1(5542.5,2062.5)
USART2_RX: B1.87 P5.4 | length 1339.6
  Top Layer w7: v1@5005,2280 v1(5005.31,2280.32) B1.87 ; P5.4 v1(6060,2195)
  Bottom Layer w7: v1(5005.31,2280.32) 5005.31,2149.68 5994.69,2149.68 6040,2195 v1(6060,2195)
USART2_TX: B1.86 P5.3 | length 1374.1
  Top Layer w7: v1(4970.63,2285) 4985.63,2300 B1.86 ; v1(6010,2065) P5.3
  Bottom Layer w7: v1(4970.63,2285) 4970.63,2119.37 4990,2100 5955,2100 5990,2065 v1(6010,2065)
USART3_RX/SDA2: B1.48 P13.3 R16.2 | length 493.8
  Top Layer w7: v1(4820,2885) 4828.15,2893.15 B1.48 ; v1(5015,3080) P13.3
  Bottom Layer w7: v1(4820,2885) 4830,2895 R16.2 4863.46,3020 4925,3020 4935,3030 4935,3075 4940,3080 v1(5015,3080)
USART3_TX/SCL2: B1.47 P13.4 R17.2 | length 408.4
  Top Layer w7: B1.47 4847.83,2892.17 v1(4855,2885) ; v1(4965,3050) P13.4
  Bottom Layer w7: v1(4855,2885) 4855,2951.54 R17.2 4941.54,2986.54 4965,3010 v1(4965,3050)
USART5_RX: B1.83 P6.4 | length 402.1
  Top Layer w12: B1.83 4926.57,2273.43 4945,2255 5115,2255 5125,2245 P6.4
USART5_TX: B1.80 P6.3 | length 504.9
  Top Layer w12: B1.80 4867.52,2167.48 4970,2065 5070,2065 5075,2070 P6.3
VCC_2S_6S: D3.1 P1.1 R5.1 | length 207.2
  Bottom Layer w30: D3.1 6193.46,3188.54 R5.1 6253.46,3065 P1.1
VCC_IN: *1.5 C12.2 D3.2 R12.2 | length 472.9
  Bottom Layer w20: R12.2 5755,3241.54 5755,3180 5765,3170 *1.5 5875,3170 5927,3222 D3.2
  Bottom Layer w30: D3.2 5978.9,3246.12 C12.2
VREF+: B1.21 C11.2 R7.2 U1.1 U1.2 | length 242.7
  Bottom Layer w15: R7.2 4793.86,3280 U1.2 U1.1 4833.89,3129.97 C11.2
pads on no net: B1.3 B1.4 B1.5 B1.7 B1.8 B1.9 B1.46 B1.77 B1.78 B1.79 B1.81 B1.82 B1.84 B1.85 B1.89 B1.90 B1.91 B1.95 B1.96 P4.5 P4.6 P5.5 P5.6 P6.5 P6.6 P13.5 P13.6 P14.5 P14.6 SWD1.6 SWD1.7 SWD1.8 U2.1 U2.3 U2.6 U2.8 U2.9 U2.12 U2.14 U2.17 U3.6 U4.1 U4.2 U4.3 U4.4 U4.5 U4.14 U4.15 U4.16 U4.17 U4.19 U4.21 U4.22 U4.25 U5.9 USB1.4 USB1.6 USB1.7 USB1.8

## Polygon pours and split planes (outlines as drawn)
GND on GND (split plane): 6368.27,3314.11 6374.74,3312.25 6380.95,3309.67 6386.84,3306.42 6392.33,3302.52 6397.35,3298.04 6401.83,3293.02 6405.72,3287.54 6408.98,3281.65 6411.55,3275.43 6413.41,3268.97 6414.54,3262.34 6414.88,3256.21 6414.83,3255.62 6414.9,3254.83 6414.9,2020.58 6414.78,2018.39 6413.65,2011.76 6411.79,2005.29 6409.22,1999.08 6405.96,1993.19 6402.07,1987.7 6397.59,1982.68 6392.57,1978.2 6387.08,1974.31 6381.19,1971.05 6374.98,1968.48 6368.51,1966.62 6361.88,1965.49 6355.75,1965.14 6355.16,1965.2 6354.08,1965.1 4246.55,1965.1 4246.17,1965.13 4246.18,1965.22 4243.28,1965.38 4236.65,1966.51 4230.19,1968.37 4223.97,1970.95 4218.08,1974.2 4212.59,1978.09 4207.58,1982.58 4203.09,1987.59 4199.2,1993.08 4195.95,1998.97 4193.37,2005.19 4191.51,2011.65 4190.38,2018.28 4190.04,2024.41 4190.1,2025 4190.1,3260.03 4189.87,3262.28 4190.89,3268.27 4192.75,3274.74 4195.33,3280.95 4198.58,3286.84 4202.48,3292.33 4206.96,3297.35 4211.98,3301.83 4217.46,3305.72 4223.35,3308.98 4229.57,3311.55 4236.03,3313.41 4242.66,3314.54 4248.79,3314.88 4249.38,3314.83 4250.17,3314.9 6360.03,3314.9 6362.28,3315.13
3.3V on 3.3V (split plane): 6368.27,3314.11 6374.74,3312.25 6380.95,3309.67 6386.84,3306.42 6392.33,3302.52 6397.35,3298.04 6401.83,3293.02 6405.72,3287.54 6408.98,3281.65 6411.55,3275.43 6413.41,3268.97 6414.54,3262.34 6414.88,3256.21 6414.83,3255.62 6414.9,3254.83 6414.9,2020.58 6414.78,2018.39 6413.65,2011.76 6411.79,2005.29 6409.22,1999.08 6405.96,1993.19 6402.07,1987.7 6397.59,1982.68 6392.57,1978.2 6387.08,1974.31 6381.19,1971.05 6374.98,1968.48 6368.51,1966.62 6361.88,1965.49 6355.75,1965.14 6355.16,1965.2 6354.08,1965.1 4246.55,1965.1 4246.17,1965.13 4246.18,1965.22 4243.28,1965.38 4236.65,1966.51 4230.19,1968.37 4223.97,1970.95 4218.08,1974.2 4212.59,1978.09 4207.58,1982.58 4203.09,1987.59 4199.2,1993.08 4195.95,1998.97 4193.37,2005.19 4191.51,2011.65 4190.38,2018.28 4190.04,2024.41 4190.1,2025 4190.1,3260.03 4189.87,3262.28 4190.89,3268.27 4192.75,3274.74 4195.33,3280.95 4198.58,3286.84 4202.48,3292.33 4206.96,3297.35 4211.98,3301.83 4217.46,3305.72 4223.35,3308.98 4229.57,3311.55 4236.03,3313.41 4242.66,3314.54 4248.79,3314.88 4249.38,3314.83 4250.17,3314.9 6360.03,3314.9 6362.28,3315.13

## Keep-outs
Keep-Out Layer:
  lines w5.91: 4170,2025 4170,3260.03 ; 4244.89,1945 6355.16,1945 ; 4249.38,3335 6360.03,3335 ; 6435,2020 6435,3255.62
  lines w10: 4169.55,3260.03 cw(c4249.38,3254.92) 4249.38,3334.92 ; 4170,2025 ccw(c4250,2025) 4244.89,1945.16 ; 6355.16,1945.11 ccw(c6355.16,2025.11) 6435,2020 ; 6360.03,3335.45 cw(c6354.92,3255.62) 6434.92,3255.62